# EAGLE board RedBot Accelerometer-Panel-v12 (EAGLE 6.5.0), part 1 of 4
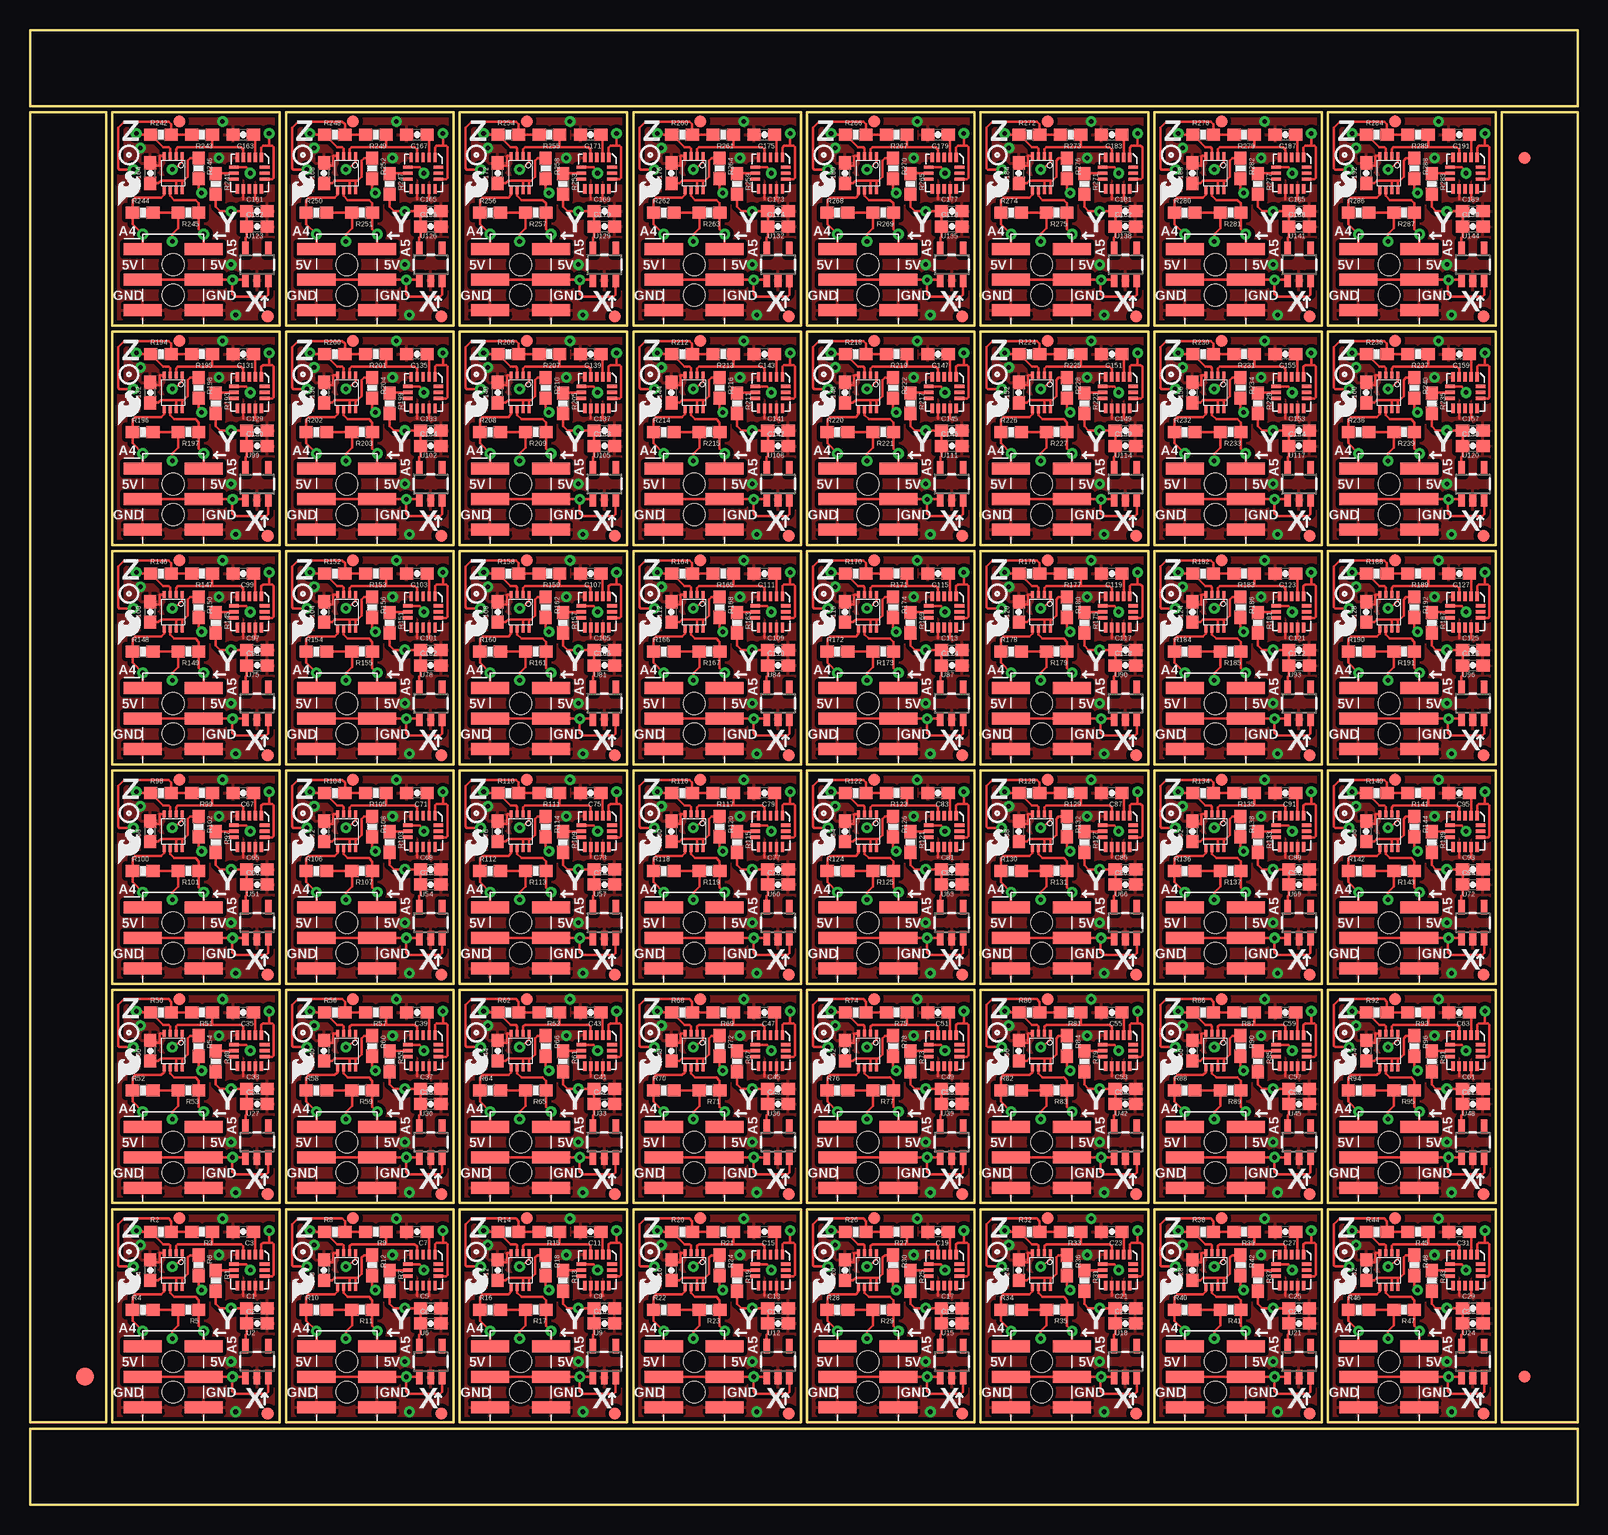
[diagram p0: board, top side]
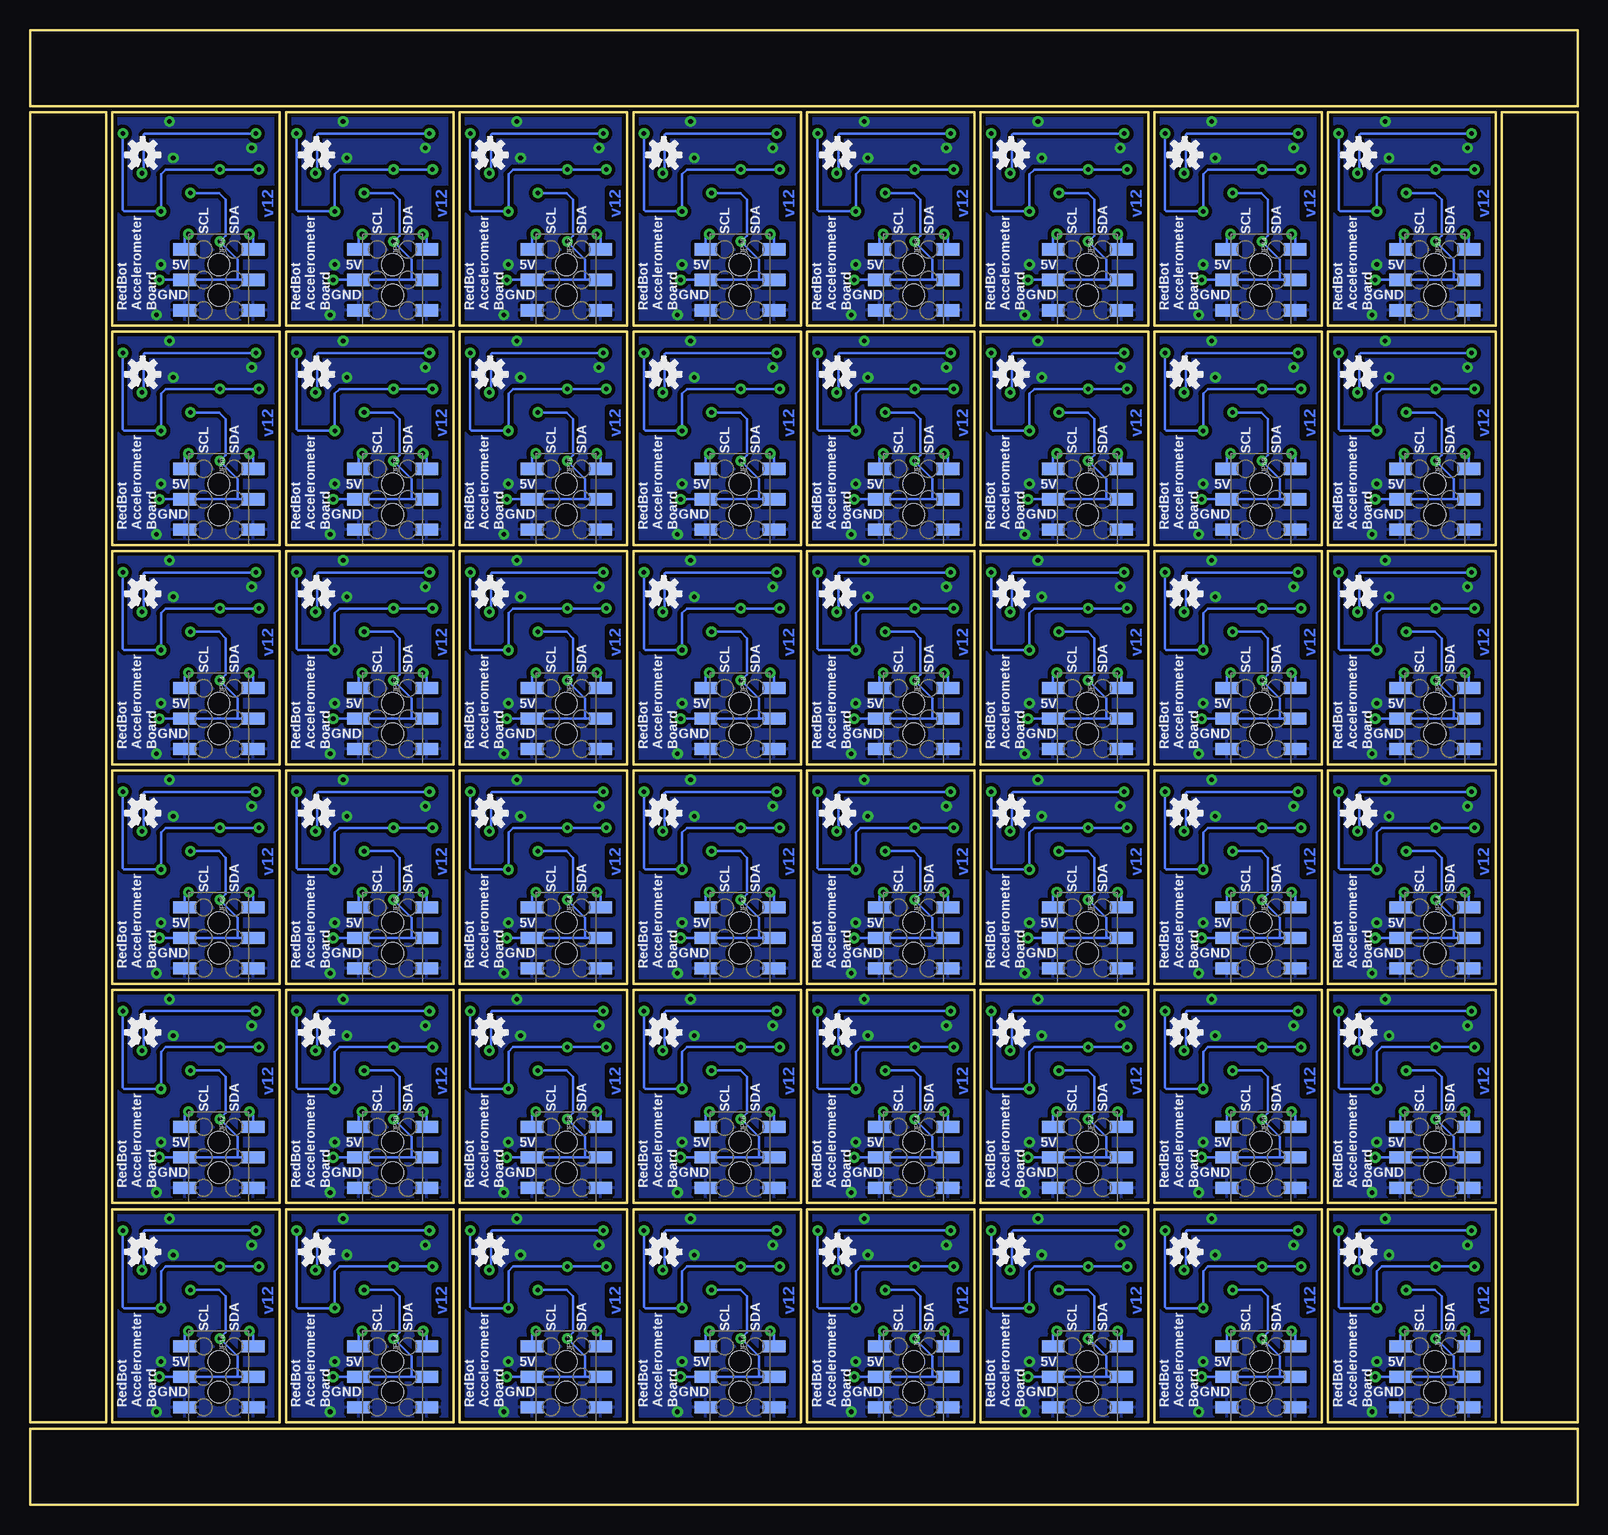
[diagram p1: board, bottom side, seen from below]

Size 129.03 x 122.94 mm. Coordinates in mm from the lower left corner, seen from the top.
Outline: 208 segments
Copper layers (1*16): Top 0.035mm / dielectric 1.5mm / Bottom 0.035mm
Design rules "SparkFun-2-layer": minimum track width 7mil, minimum drill 15mil, track to track 8mil, track to pad 8mil, pad to pad 8mil, via to via 8mil, smd to smd 8mil, copper to edge 8mil, drill to drill 8mil, minimum pad ring 12mil, minimum via ring 10mil, stop-mask expansion 4mil, vias tented up to drill 20mil, thermal gap 10mil

## Footprints (pad centres in the part's own frame; a part is rotated, then mirrored left to right if it is on the bottom)
0603-CAP = smd 1.1 x 1: 1 -0.85,0; 2 0.85,0
FIDUCIAL-1.5X3 = smd 1.5 x 1.5: 1 0,0
FIDUCIAL-1X2 = smd 1 x 1: 1 0,0
2X3_SMT_POSTS = smd 1 x 3.17: 1 -2.54,-2.54; 2 -2.54,2.54; 3 0,-2.54; 4 0,2.54; 5 2.54,-2.54; 6 2.54,2.54 | hole 1.8: -1.27,0; 1.27,0
2X3_SMD = smd 1.02 x 1.9: 1 -2.54,-2.85; 2 -2.54,2.85; 3 0,-2.85; 4 0,2.85; 5 2.54,-2.85; 6 2.54,2.85
0603-RES = smd 1.1 x 1: 1 -0.85,0; 2 0.85,0
MMA8452Q-1:1 = smd 0.8 x 0.275: 1 -1.3,1; 2 -1.3,0.5; 3 -1.3,0; 4 -1.3,-0.5; 5 -1.3,-1; 9 1.3,-1; 10 1.3,-0.5; 11 1.3,0; 12 1.3,0.5; 13 1.3,1 | smd 0.29 x 0.8: 6 -0.5,-1.275; 7 0,-1.275; 8 0.5,-1.275; 14 0.5,1.275; 15 0,1.275; 16 -0.5,1.275
SOT23-5 = smd 0.55 x 1.2: 1 -0.95,-1.3; 2 0,-1.3; 3 0.95,-1.3; 4 0.95,1.3; 5 -0.95,1.3
PCA9306DC-1:1 = smd 0.25 x 0.602: 1 -0.73,-1.446; 2 -0.23,-1.446; 3 0.27,-1.446; 4 0.77,-1.446; 5 0.77,1.431; 6 0.27,1.431; 7 -0.23,1.431; 8 -0.73,1.431

## Placement (x,y rotation side)
C1  0.1uF  [0603-CAP]  18.92,16.38 0 top
C2  4.7uF  [0603-CAP]  18.92,15.11 0 top
C3  0.1uF  [0603-CAP]  17.78,22.76 180 top
C4  0.1uF  [0603-CAP]  10.03,19.56 90 top
C5  0.1uF  [0603-CAP]  33.4,16.38 0 top
C6  4.7uF  [0603-CAP]  33.4,15.11 0 top
C7  0.1uF  [0603-CAP]  32.26,22.76 180 top
C8  0.1uF  [0603-CAP]  24.51,19.56 90 top
C9  0.1uF  [0603-CAP]  47.88,16.38 0 top
C10  4.7uF  [0603-CAP]  47.88,15.11 0 top
C11  0.1uF  [0603-CAP]  46.74,22.76 180 top
C12  0.1uF  [0603-CAP]  38.99,19.56 90 top
C13  0.1uF  [0603-CAP]  62.36,16.38 0 top
C14  4.7uF  [0603-CAP]  62.36,15.11 0 top
C15  0.1uF  [0603-CAP]  61.21,22.76 180 top
C16  0.1uF  [0603-CAP]  53.47,19.56 90 top
C17  0.1uF  [0603-CAP]  76.83,16.38 0 top
C18  4.7uF  [0603-CAP]  76.83,15.11 0 top
C19  0.1uF  [0603-CAP]  75.69,22.76 180 top
C20  0.1uF  [0603-CAP]  67.94,19.56 90 top
C21  0.1uF  [0603-CAP]  91.31,16.38 0 top
C22  4.7uF  [0603-CAP]  91.31,15.11 0 top
C23  0.1uF  [0603-CAP]  90.17,22.76 180 top
C24  0.1uF  [0603-CAP]  82.42,19.56 90 top
C25  0.1uF  [0603-CAP]  105.79,16.38 0 top
C26  4.7uF  [0603-CAP]  105.79,15.11 0 top
C27  0.1uF  [0603-CAP]  104.65,22.76 180 top
C28  0.1uF  [0603-CAP]  96.9,19.56 90 top
C29  0.1uF  [0603-CAP]  120.27,16.38 0 top
C30  4.7uF  [0603-CAP]  120.27,15.11 0 top
C31  0.1uF  [0603-CAP]  119.13,22.76 180 top
C32  0.1uF  [0603-CAP]  111.38,19.56 90 top
C33  0.1uF  [0603-CAP]  18.92,34.67 0 top
C34  4.7uF  [0603-CAP]  18.92,33.4 0 top
C35  0.1uF  [0603-CAP]  17.78,41.05 180 top
C36  0.1uF  [0603-CAP]  10.03,37.85 90 top
C37  0.1uF  [0603-CAP]  33.4,34.67 0 top
C38  4.7uF  [0603-CAP]  33.4,33.4 0 top
C39  0.1uF  [0603-CAP]  32.26,41.05 180 top
C40  0.1uF  [0603-CAP]  24.51,37.85 90 top
C41  0.1uF  [0603-CAP]  47.88,34.67 0 top
C42  4.7uF  [0603-CAP]  47.88,33.4 0 top
C43  0.1uF  [0603-CAP]  46.74,41.05 180 top
C44  0.1uF  [0603-CAP]  38.99,37.85 90 top
C45  0.1uF  [0603-CAP]  62.36,34.67 0 top
C46  4.7uF  [0603-CAP]  62.36,33.4 0 top
C47  0.1uF  [0603-CAP]  61.21,41.05 180 top
C48  0.1uF  [0603-CAP]  53.47,37.85 90 top
C49  0.1uF  [0603-CAP]  76.83,34.67 0 top
C50  4.7uF  [0603-CAP]  76.83,33.4 0 top
C51  0.1uF  [0603-CAP]  75.69,41.05 180 top
C52  0.1uF  [0603-CAP]  67.94,37.85 90 top
C53  0.1uF  [0603-CAP]  91.31,34.67 0 top
C54  4.7uF  [0603-CAP]  91.31,33.4 0 top
C55  0.1uF  [0603-CAP]  90.17,41.05 180 top
C56  0.1uF  [0603-CAP]  82.42,37.85 90 top
C57  0.1uF  [0603-CAP]  105.79,34.67 0 top
C58  4.7uF  [0603-CAP]  105.79,33.4 0 top
C59  0.1uF  [0603-CAP]  104.65,41.05 180 top
C60  0.1uF  [0603-CAP]  96.9,37.85 90 top
C61  0.1uF  [0603-CAP]  120.27,34.67 0 top
C62  4.7uF  [0603-CAP]  120.27,33.4 0 top
C63  0.1uF  [0603-CAP]  119.13,41.05 180 top
C64  0.1uF  [0603-CAP]  111.38,37.85 90 top
C65  0.1uF  [0603-CAP]  18.92,52.96 0 top
C66  4.7uF  [0603-CAP]  18.92,51.69 0 top
C67  0.1uF  [0603-CAP]  17.78,59.34 180 top
C68  0.1uF  [0603-CAP]  10.03,56.13 90 top
C69  0.1uF  [0603-CAP]  33.4,52.96 0 top
C70  4.7uF  [0603-CAP]  33.4,51.69 0 top
C71  0.1uF  [0603-CAP]  32.26,59.34 180 top
C72  0.1uF  [0603-CAP]  24.51,56.13 90 top
C73  0.1uF  [0603-CAP]  47.88,52.96 0 top
C74  4.7uF  [0603-CAP]  47.88,51.69 0 top
C75  0.1uF  [0603-CAP]  46.74,59.34 180 top
C76  0.1uF  [0603-CAP]  38.99,56.13 90 top
C77  0.1uF  [0603-CAP]  62.36,52.96 0 top
C78  4.7uF  [0603-CAP]  62.36,51.69 0 top
C79  0.1uF  [0603-CAP]  61.21,59.34 180 top
C80  0.1uF  [0603-CAP]  53.47,56.13 90 top
C81  0.1uF  [0603-CAP]  76.83,52.96 0 top
C82  4.7uF  [0603-CAP]  76.83,51.69 0 top
C83  0.1uF  [0603-CAP]  75.69,59.34 180 top
C84  0.1uF  [0603-CAP]  67.94,56.13 90 top
C85  0.1uF  [0603-CAP]  91.31,52.96 0 top
C86  4.7uF  [0603-CAP]  91.31,51.69 0 top
C87  0.1uF  [0603-CAP]  90.17,59.34 180 top
C88  0.1uF  [0603-CAP]  82.42,56.13 90 top
C89  0.1uF  [0603-CAP]  105.79,52.96 0 top
C90  4.7uF  [0603-CAP]  105.79,51.69 0 top
C91  0.1uF  [0603-CAP]  104.65,59.34 180 top
C92  0.1uF  [0603-CAP]  96.9,56.13 90 top
C93  0.1uF  [0603-CAP]  120.27,52.96 0 top
C94  4.7uF  [0603-CAP]  120.27,51.69 0 top
C95  0.1uF  [0603-CAP]  119.13,59.34 180 top
C96  0.1uF  [0603-CAP]  111.38,56.13 90 top
C97  0.1uF  [0603-CAP]  18.92,71.25 0 top
C98  4.7uF  [0603-CAP]  18.92,69.98 0 top
C99  0.1uF  [0603-CAP]  17.78,77.62 180 top
C100  0.1uF  [0603-CAP]  10.03,74.42 90 top
C101  0.1uF  [0603-CAP]  33.4,71.25 0 top
C102  4.7uF  [0603-CAP]  33.4,69.98 0 top
C103  0.1uF  [0603-CAP]  32.26,77.62 180 top
C104  0.1uF  [0603-CAP]  24.51,74.42 90 top
C105  0.1uF  [0603-CAP]  47.88,71.25 0 top
C106  4.7uF  [0603-CAP]  47.88,69.98 0 top
C107  0.1uF  [0603-CAP]  46.74,77.62 180 top
C108  0.1uF  [0603-CAP]  38.99,74.42 90 top
C109  0.1uF  [0603-CAP]  62.36,71.25 0 top
C110  4.7uF  [0603-CAP]  62.36,69.98 0 top
C111  0.1uF  [0603-CAP]  61.21,77.62 180 top
C112  0.1uF  [0603-CAP]  53.47,74.42 90 top
C113  0.1uF  [0603-CAP]  76.83,71.25 0 top
C114  4.7uF  [0603-CAP]  76.83,69.98 0 top
C115  0.1uF  [0603-CAP]  75.69,77.62 180 top
C116  0.1uF  [0603-CAP]  67.94,74.42 90 top
C117  0.1uF  [0603-CAP]  91.31,71.25 0 top
C118  4.7uF  [0603-CAP]  91.31,69.98 0 top
C119  0.1uF  [0603-CAP]  90.17,77.62 180 top
C120  0.1uF  [0603-CAP]  82.42,74.42 90 top
C121  0.1uF  [0603-CAP]  105.79,71.25 0 top
C122  4.7uF  [0603-CAP]  105.79,69.98 0 top
C123  0.1uF  [0603-CAP]  104.65,77.62 180 top
C124  0.1uF  [0603-CAP]  96.9,74.42 90 top
C125  0.1uF  [0603-CAP]  120.27,71.25 0 top
C126  4.7uF  [0603-CAP]  120.27,69.98 0 top
C127  0.1uF  [0603-CAP]  119.13,77.62 180 top
C128  0.1uF  [0603-CAP]  111.38,74.42 90 top
C129  0.1uF  [0603-CAP]  18.92,89.53 0 top
C130  4.7uF  [0603-CAP]  18.92,88.27 0 top
C131  0.1uF  [0603-CAP]  17.78,95.91 180 top
C132  0.1uF  [0603-CAP]  10.03,92.71 90 top
C133  0.1uF  [0603-CAP]  33.4,89.53 0 top
C134  4.7uF  [0603-CAP]  33.4,88.27 0 top
C135  0.1uF  [0603-CAP]  32.26,95.91 180 top
C136  0.1uF  [0603-CAP]  24.51,92.71 90 top
C137  0.1uF  [0603-CAP]  47.88,89.53 0 top
C138  4.7uF  [0603-CAP]  47.88,88.27 0 top
C139  0.1uF  [0603-CAP]  46.74,95.91 180 top
C140  0.1uF  [0603-CAP]  38.99,92.71 90 top
C141  0.1uF  [0603-CAP]  62.36,89.53 0 top
C142  4.7uF  [0603-CAP]  62.36,88.27 0 top
C143  0.1uF  [0603-CAP]  61.21,95.91 180 top
C144  0.1uF  [0603-CAP]  53.47,92.71 90 top
C145  0.1uF  [0603-CAP]  76.83,89.53 0 top
C146  4.7uF  [0603-CAP]  76.83,88.27 0 top
C147  0.1uF  [0603-CAP]  75.69,95.91 180 top
C148  0.1uF  [0603-CAP]  67.94,92.71 90 top
C149  0.1uF  [0603-CAP]  91.31,89.53 0 top
C150  4.7uF  [0603-CAP]  91.31,88.27 0 top
C151  0.1uF  [0603-CAP]  90.17,95.91 180 top
C152  0.1uF  [0603-CAP]  82.42,92.71 90 top
C153  0.1uF  [0603-CAP]  105.79,89.53 0 top
C154  4.7uF  [0603-CAP]  105.79,88.27 0 top
C155  0.1uF  [0603-CAP]  104.65,95.91 180 top
C156  0.1uF  [0603-CAP]  96.9,92.71 90 top
C157  0.1uF  [0603-CAP]  120.27,89.53 0 top
C158  4.7uF  [0603-CAP]  120.27,88.27 0 top
C159  0.1uF  [0603-CAP]  119.13,95.91 180 top
C160  0.1uF  [0603-CAP]  111.38,92.71 90 top
C161  0.1uF  [0603-CAP]  18.92,107.82 0 top
C162  4.7uF  [0603-CAP]  18.92,106.55 0 top
C163  0.1uF  [0603-CAP]  17.78,114.2 180 top
C164  0.1uF  [0603-CAP]  10.03,111 90 top
C165  0.1uF  [0603-CAP]  33.4,107.82 0 top
C166  4.7uF  [0603-CAP]  33.4,106.55 0 top
C167  0.1uF  [0603-CAP]  32.26,114.2 180 top
C168  0.1uF  [0603-CAP]  24.51,111 90 top
C169  0.1uF  [0603-CAP]  47.88,107.82 0 top
C170  4.7uF  [0603-CAP]  47.88,106.55 0 top
C171  0.1uF  [0603-CAP]  46.74,114.2 180 top
C172  0.1uF  [0603-CAP]  38.99,111 90 top
C173  0.1uF  [0603-CAP]  62.36,107.82 0 top
C174  4.7uF  [0603-CAP]  62.36,106.55 0 top
C175  0.1uF  [0603-CAP]  61.21,114.2 180 top
C176  0.1uF  [0603-CAP]  53.47,111 90 top
C177  0.1uF  [0603-CAP]  76.83,107.82 0 top
C178  4.7uF  [0603-CAP]  76.83,106.55 0 top
C179  0.1uF  [0603-CAP]  75.69,114.2 180 top
C180  0.1uF  [0603-CAP]  67.94,111 90 top
C181  0.1uF  [0603-CAP]  91.31,107.82 0 top
C182  4.7uF  [0603-CAP]  91.31,106.55 0 top
C183  0.1uF  [0603-CAP]  90.17,114.2 180 top
C184  0.1uF  [0603-CAP]  82.42,111 90 top
C185  0.1uF  [0603-CAP]  105.79,107.82 0 top
C186  4.7uF  [0603-CAP]  105.79,106.55 0 top
C187  0.1uF  [0603-CAP]  104.65,114.2 180 top
C188  0.1uF  [0603-CAP]  96.9,111 90 top
C189  0.1uF  [0603-CAP]  120.27,107.82 0 top
C190  4.7uF  [0603-CAP]  120.27,106.55 0 top
C191  0.1uF  [0603-CAP]  119.13,114.2 180 top
C192  0.1uF  [0603-CAP]  111.38,111 90 top
E$1  [FIDUCIAL-1.5X3]  4.57,10.67 0 top
E$4  [FIDUCIAL-1X2]  124.59,10.67 0 top
E$6  [FIDUCIAL-1X2]  124.59,112.27 180 top
FID1  FIDUCIAL1X2  [FIDUCIAL-1X2]  19.81,7.62 0 top
FID2  FIDUCIAL1X2  [FIDUCIAL-1X2]  12.45,23.88 0 top
FID3  FIDUCIAL1X2  [FIDUCIAL-1X2]  34.29,7.62 0 top
FID4  FIDUCIAL1X2  [FIDUCIAL-1X2]  26.92,23.88 0 top
FID5  FIDUCIAL1X2  [FIDUCIAL-1X2]  48.77,7.62 0 top
FID6  FIDUCIAL1X2  [FIDUCIAL-1X2]  41.4,23.88 0 top
FID7  FIDUCIAL1X2  [FIDUCIAL-1X2]  63.25,7.62 0 top
FID8  FIDUCIAL1X2  [FIDUCIAL-1X2]  55.88,23.88 0 top
FID9  FIDUCIAL1X2  [FIDUCIAL-1X2]  77.72,7.62 0 top
FID10  FIDUCIAL1X2  [FIDUCIAL-1X2]  70.36,23.88 0 top
FID11  FIDUCIAL1X2  [FIDUCIAL-1X2]  92.2,7.62 0 top
FID12  FIDUCIAL1X2  [FIDUCIAL-1X2]  84.84,23.88 0 top
FID13  FIDUCIAL1X2  [FIDUCIAL-1X2]  106.68,7.62 0 top
FID14  FIDUCIAL1X2  [FIDUCIAL-1X2]  99.31,23.88 0 top
FID15  FIDUCIAL1X2  [FIDUCIAL-1X2]  121.16,7.62 0 top
FID16  FIDUCIAL1X2  [FIDUCIAL-1X2]  113.79,23.88 0 top
FID17  FIDUCIAL1X2  [FIDUCIAL-1X2]  19.81,25.91 0 top
FID18  FIDUCIAL1X2  [FIDUCIAL-1X2]  12.45,42.16 0 top
FID19  FIDUCIAL1X2  [FIDUCIAL-1X2]  34.29,25.91 0 top
FID20  FIDUCIAL1X2  [FIDUCIAL-1X2]  26.92,42.16 0 top
FID21  FIDUCIAL1X2  [FIDUCIAL-1X2]  48.77,25.91 0 top
FID22  FIDUCIAL1X2  [FIDUCIAL-1X2]  41.4,42.16 0 top
FID23  FIDUCIAL1X2  [FIDUCIAL-1X2]  63.25,25.91 0 top
FID24  FIDUCIAL1X2  [FIDUCIAL-1X2]  55.88,42.16 0 top
FID25  FIDUCIAL1X2  [FIDUCIAL-1X2]  77.72,25.91 0 top
FID26  FIDUCIAL1X2  [FIDUCIAL-1X2]  70.36,42.16 0 top
FID27  FIDUCIAL1X2  [FIDUCIAL-1X2]  92.2,25.91 0 top
FID28  FIDUCIAL1X2  [FIDUCIAL-1X2]  84.84,42.16 0 top
FID29  FIDUCIAL1X2  [FIDUCIAL-1X2]  106.68,25.91 0 top
FID30  FIDUCIAL1X2  [FIDUCIAL-1X2]  99.31,42.16 0 top
FID31  FIDUCIAL1X2  [FIDUCIAL-1X2]  121.16,25.91 0 top
FID32  FIDUCIAL1X2  [FIDUCIAL-1X2]  113.79,42.16 0 top
FID33  FIDUCIAL1X2  [FIDUCIAL-1X2]  19.81,44.2 0 top
FID34  FIDUCIAL1X2  [FIDUCIAL-1X2]  12.45,60.45 0 top
FID35  FIDUCIAL1X2  [FIDUCIAL-1X2]  34.29,44.2 0 top
FID36  FIDUCIAL1X2  [FIDUCIAL-1X2]  26.92,60.45 0 top
FID37  FIDUCIAL1X2  [FIDUCIAL-1X2]  48.77,44.2 0 top
FID38  FIDUCIAL1X2  [FIDUCIAL-1X2]  41.4,60.45 0 top
FID39  FIDUCIAL1X2  [FIDUCIAL-1X2]  63.25,44.2 0 top
FID40  FIDUCIAL1X2  [FIDUCIAL-1X2]  55.88,60.45 0 top
FID41  FIDUCIAL1X2  [FIDUCIAL-1X2]  77.72,44.2 0 top
FID42  FIDUCIAL1X2  [FIDUCIAL-1X2]  70.36,60.45 0 top
FID43  FIDUCIAL1X2  [FIDUCIAL-1X2]  92.2,44.2 0 top
FID44  FIDUCIAL1X2  [FIDUCIAL-1X2]  84.84,60.45 0 top
FID45  FIDUCIAL1X2  [FIDUCIAL-1X2]  106.68,44.2 0 top
FID46  FIDUCIAL1X2  [FIDUCIAL-1X2]  99.31,60.45 0 top
FID47  FIDUCIAL1X2  [FIDUCIAL-1X2]  121.16,44.2 0 top
FID48  FIDUCIAL1X2  [FIDUCIAL-1X2]  113.79,60.45 0 top
FID49  FIDUCIAL1X2  [FIDUCIAL-1X2]  19.81,62.48 0 top
FID50  FIDUCIAL1X2  [FIDUCIAL-1X2]  12.45,78.74 0 top
FID51  FIDUCIAL1X2  [FIDUCIAL-1X2]  34.29,62.48 0 top
FID52  FIDUCIAL1X2  [FIDUCIAL-1X2]  26.92,78.74 0 top
FID53  FIDUCIAL1X2  [FIDUCIAL-1X2]  48.77,62.48 0 top
FID54  FIDUCIAL1X2  [FIDUCIAL-1X2]  41.4,78.74 0 top
FID55  FIDUCIAL1X2  [FIDUCIAL-1X2]  63.25,62.48 0 top
FID56  FIDUCIAL1X2  [FIDUCIAL-1X2]  55.88,78.74 0 top
FID57  FIDUCIAL1X2  [FIDUCIAL-1X2]  77.72,62.48 0 top
FID58  FIDUCIAL1X2  [FIDUCIAL-1X2]  70.36,78.74 0 top
FID59  FIDUCIAL1X2  [FIDUCIAL-1X2]  92.2,62.48 0 top
FID60  FIDUCIAL1X2  [FIDUCIAL-1X2]  84.84,78.74 0 top
FID61  FIDUCIAL1X2  [FIDUCIAL-1X2]  106.68,62.48 0 top
FID62  FIDUCIAL1X2  [FIDUCIAL-1X2]  99.31,78.74 0 top
FID63  FIDUCIAL1X2  [FIDUCIAL-1X2]  121.16,62.48 0 top
FID64  FIDUCIAL1X2  [FIDUCIAL-1X2]  113.79,78.74 0 top
FID65  FIDUCIAL1X2  [FIDUCIAL-1X2]  19.81,80.77 0 top
FID66  FIDUCIAL1X2  [FIDUCIAL-1X2]  12.45,97.03 0 top
FID67  FIDUCIAL1X2  [FIDUCIAL-1X2]  34.29,80.77 0 top
FID68  FIDUCIAL1X2  [FIDUCIAL-1X2]  26.92,97.03 0 top
FID69  FIDUCIAL1X2  [FIDUCIAL-1X2]  48.77,80.77 0 top
FID70  FIDUCIAL1X2  [FIDUCIAL-1X2]  41.4,97.03 0 top
FID71  FIDUCIAL1X2  [FIDUCIAL-1X2]  63.25,80.77 0 top
FID72  FIDUCIAL1X2  [FIDUCIAL-1X2]  55.88,97.03 0 top
FID73  FIDUCIAL1X2  [FIDUCIAL-1X2]  77.72,80.77 0 top
FID74  FIDUCIAL1X2  [FIDUCIAL-1X2]  70.36,97.03 0 top
FID75  FIDUCIAL1X2  [FIDUCIAL-1X2]  92.2,80.77 0 top
FID76  FIDUCIAL1X2  [FIDUCIAL-1X2]  84.84,97.03 0 top
FID77  FIDUCIAL1X2  [FIDUCIAL-1X2]  106.68,80.77 0 top
FID78  FIDUCIAL1X2  [FIDUCIAL-1X2]  99.31,97.03 0 top
FID79  FIDUCIAL1X2  [FIDUCIAL-1X2]  121.16,80.77 0 top
FID80  FIDUCIAL1X2  [FIDUCIAL-1X2]  113.79,97.03 0 top
FID81  FIDUCIAL1X2  [FIDUCIAL-1X2]  19.81,99.06 0 top
FID82  FIDUCIAL1X2  [FIDUCIAL-1X2]  12.45,115.32 0 top
FID83  FIDUCIAL1X2  [FIDUCIAL-1X2]  34.29,99.06 0 top
FID84  FIDUCIAL1X2  [FIDUCIAL-1X2]  26.92,115.32 0 top
FID85  FIDUCIAL1X2  [FIDUCIAL-1X2]  48.77,99.06 0 top
FID86  FIDUCIAL1X2  [FIDUCIAL-1X2]  41.4,115.32 0 top
FID87  FIDUCIAL1X2  [FIDUCIAL-1X2]  63.25,99.06 0 top
FID88  FIDUCIAL1X2  [FIDUCIAL-1X2]  55.88,115.32 0 top
FID89  FIDUCIAL1X2  [FIDUCIAL-1X2]  77.72,99.06 0 top
FID90  FIDUCIAL1X2  [FIDUCIAL-1X2]  70.36,115.32 0 top
FID91  FIDUCIAL1X2  [FIDUCIAL-1X2]  92.2,99.06 0 top
FID92  FIDUCIAL1X2  [FIDUCIAL-1X2]  84.84,115.32 0 top
FID93  FIDUCIAL1X2  [FIDUCIAL-1X2]  106.68,99.06 0 top
FID94  FIDUCIAL1X2  [FIDUCIAL-1X2]  99.31,115.32 0 top
FID95  FIDUCIAL1X2  [FIDUCIAL-1X2]  121.16,99.06 0 top
FID96  FIDUCIAL1X2  [FIDUCIAL-1X2]  113.79,115.32 0 top
JP1  [2X3_SMT_POSTS]  11.94,10.67 270 top
JP2  [2X3_SMD]  11.94,10.67 270 bottom
JP3  [2X3_SMT_POSTS]  26.42,10.67 270 top
JP4  [2X3_SMD]  26.42,10.67 270 bottom
JP5  [2X3_SMT_POSTS]  40.89,10.67 270 top
JP6  [2X3_SMD]  40.89,10.67 270 bottom
JP7  [2X3_SMT_POSTS]  55.37,10.67 270 top
JP8  [2X3_SMD]  55.37,10.67 270 bottom
JP9  [2X3_SMT_POSTS]  69.85,10.67 270 top
JP10  [2X3_SMD]  69.85,10.67 270 bottom
JP11  [2X3_SMT_POSTS]  84.33,10.67 270 top
JP12  [2X3_SMD]  84.33,10.67 270 bottom
JP13  [2X3_SMT_POSTS]  98.81,10.67 270 top
JP14  [2X3_SMD]  98.81,10.67 270 bottom
JP15  [2X3_SMT_POSTS]  113.28,10.67 270 top
JP16  [2X3_SMD]  113.28,10.67 270 bottom
JP17  [2X3_SMT_POSTS]  11.94,28.96 270 top
JP18  [2X3_SMD]  11.94,28.96 270 bottom
JP19  [2X3_SMT_POSTS]  26.42,28.96 270 top
JP20  [2X3_SMD]  26.42,28.96 270 bottom
JP21  [2X3_SMT_POSTS]  40.89,28.96 270 top
JP22  [2X3_SMD]  40.89,28.96 270 bottom
JP23  [2X3_SMT_POSTS]  55.37,28.96 270 top
JP24  [2X3_SMD]  55.37,28.96 270 bottom
JP25  [2X3_SMT_POSTS]  69.85,28.96 270 top
JP26  [2X3_SMD]  69.85,28.96 270 bottom
JP27  [2X3_SMT_POSTS]  84.33,28.96 270 top
JP28  [2X3_SMD]  84.33,28.96 270 bottom
JP29  [2X3_SMT_POSTS]  98.81,28.96 270 top
JP30  [2X3_SMD]  98.81,28.96 270 bottom
JP31  [2X3_SMT_POSTS]  113.28,28.96 270 top
JP32  [2X3_SMD]  113.28,28.96 270 bottom
JP33  [2X3_SMT_POSTS]  11.94,47.24 270 top
JP34  [2X3_SMD]  11.94,47.24 270 bottom
JP35  [2X3_SMT_POSTS]  26.42,47.24 270 top
JP36  [2X3_SMD]  26.42,47.24 270 bottom
JP37  [2X3_SMT_POSTS]  40.89,47.24 270 top
JP38  [2X3_SMD]  40.89,47.24 270 bottom
JP39  [2X3_SMT_POSTS]  55.37,47.24 270 top
JP40  [2X3_SMD]  55.37,47.24 270 bottom
JP41  [2X3_SMT_POSTS]  69.85,47.24 270 top
JP42  [2X3_SMD]  69.85,47.24 270 bottom
JP43  [2X3_SMT_POSTS]  84.33,47.24 270 top
JP44  [2X3_SMD]  84.33,47.24 270 bottom
JP45  [2X3_SMT_POSTS]  98.81,47.24 270 top
JP46  [2X3_SMD]  98.81,47.24 270 bottom
JP47  [2X3_SMT_POSTS]  113.28,47.24 270 top
JP48  [2X3_SMD]  113.28,47.24 270 bottom
JP49  [2X3_SMT_POSTS]  11.94,65.53 270 top
JP50  [2X3_SMD]  11.94,65.53 270 bottom
JP51  [2X3_SMT_POSTS]  26.42,65.53 270 top
JP52  [2X3_SMD]  26.42,65.53 270 bottom
JP53  [2X3_SMT_POSTS]  40.89,65.53 270 top
JP54  [2X3_SMD]  40.89,65.53 270 bottom
JP55  [2X3_SMT_POSTS]  55.37,65.53 270 top
JP56  [2X3_SMD]  55.37,65.53 270 bottom
JP57  [2X3_SMT_POSTS]  69.85,65.53 270 top
JP58  [2X3_SMD]  69.85,65.53 270 bottom
JP59  [2X3_SMT_POSTS]  84.33,65.53 270 top
JP60  [2X3_SMD]  84.33,65.53 270 bottom
JP61  [2X3_SMT_POSTS]  98.81,65.53 270 top
JP62  [2X3_SMD]  98.81,65.53 270 bottom
JP63  [2X3_SMT_POSTS]  113.28,65.53 270 top
JP64  [2X3_SMD]  113.28,65.53 270 bottom
JP65  [2X3_SMT_POSTS]  11.94,83.82 270 top
JP66  [2X3_SMD]  11.94,83.82 270 bottom
JP67  [2X3_SMT_POSTS]  26.42,83.82 270 top
JP68  [2X3_SMD]  26.42,83.82 270 bottom
JP69  [2X3_SMT_POSTS]  40.89,83.82 270 top
JP70  [2X3_SMD]  40.89,83.82 270 bottom
JP71  [2X3_SMT_POSTS]  55.37,83.82 270 top
JP72  [2X3_SMD]  55.37,83.82 270 bottom
JP73  [2X3_SMT_POSTS]  69.85,83.82 270 top
JP74  [2X3_SMD]  69.85,83.82 270 bottom
JP75  [2X3_SMT_POSTS]  84.33,83.82 270 top
JP76  [2X3_SMD]  84.33,83.82 270 bottom
JP77  [2X3_SMT_POSTS]  98.81,83.82 270 top
JP78  [2X3_SMD]  98.81,83.82 270 bottom
JP79  [2X3_SMT_POSTS]  113.28,83.82 270 top
JP80  [2X3_SMD]  113.28,83.82 270 bottom
JP81  [2X3_SMT_POSTS]  11.94,102.11 270 top
JP82  [2X3_SMD]  11.94,102.11 270 bottom
JP83  [2X3_SMT_POSTS]  26.42,102.11 270 top
JP84  [2X3_SMD]  26.42,102.11 270 bottom
JP85  [2X3_SMT_POSTS]  40.89,102.11 270 top
JP86  [2X3_SMD]  40.89,102.11 270 bottom
JP87  [2X3_SMT_POSTS]  55.37,102.11 270 top
JP88  [2X3_SMD]  55.37,102.11 270 bottom
JP89  [2X3_SMT_POSTS]  69.85,102.11 270 top
JP90  [2X3_SMD]  69.85,102.11 270 bottom
JP91  [2X3_SMT_POSTS]  84.33,102.11 270 top
JP92  [2X3_SMD]  84.33,102.11 270 bottom
JP93  [2X3_SMT_POSTS]  98.81,102.11 270 top
JP94  [2X3_SMD]  98.81,102.11 270 bottom
JP95  [2X3_SMT_POSTS]  113.28,102.11 270 top
JP96  [2X3_SMD]  113.28,102.11 270 bottom
LOGO1  LOGO-SFESK  [SFE-LOGO-FLAME]  7.37,16.89 0 top
LOGO2  OSHW-LOGOS  [OSHW-LOGO-S]  18.29,21.08 0 bottom
LOGO3  LOGO-SFESK  [SFE-LOGO-FLAME]  21.84,16.89 0 top
LOGO4  OSHW-LOGOS  [OSHW-LOGO-S]  32.77,21.08 0 bottom
LOGO5  LOGO-SFESK  [SFE-LOGO-FLAME]  36.32,16.89 0 top
LOGO6  OSHW-LOGOS  [OSHW-LOGO-S]  47.24,21.08 0 bottom
LOGO7  LOGO-SFESK  [SFE-LOGO-FLAME]  50.8,16.89 0 top
LOGO8  OSHW-LOGOS  [OSHW-LOGO-S]  61.72,21.08 0 bottom
LOGO9  LOGO-SFESK  [SFE-LOGO-FLAME]  65.28,16.89 0 top
LOGO10  OSHW-LOGOS  [OSHW-LOGO-S]  76.2,21.08 0 bottom
LOGO11  LOGO-SFESK  [SFE-LOGO-FLAME]  79.76,16.89 0 top
LOGO12  OSHW-LOGOS  [OSHW-LOGO-S]  90.68,21.08 0 bottom
LOGO13  LOGO-SFESK  [SFE-LOGO-FLAME]  94.23,16.89 0 top
LOGO14  OSHW-LOGOS  [OSHW-LOGO-S]  105.16,21.08 0 bottom
LOGO15  LOGO-SFESK  [SFE-LOGO-FLAME]  108.71,16.89 0 top
LOGO16  OSHW-LOGOS  [OSHW-LOGO-S]  119.63,21.08 0 bottom
LOGO17  LOGO-SFESK  [SFE-LOGO-FLAME]  7.37,35.18 0 top
LOGO18  OSHW-LOGOS  [OSHW-LOGO-S]  18.29,39.37 0 bottom
LOGO19  LOGO-SFESK  [SFE-LOGO-FLAME]  21.84,35.18 0 top
LOGO20  OSHW-LOGOS  [OSHW-LOGO-S]  32.77,39.37 0 bottom
LOGO21  LOGO-SFESK  [SFE-LOGO-FLAME]  36.32,35.18 0 top
LOGO22  OSHW-LOGOS  [OSHW-LOGO-S]  47.24,39.37 0 bottom
LOGO23  LOGO-SFESK  [SFE-LOGO-FLAME]  50.8,35.18 0 top
LOGO24  OSHW-LOGOS  [OSHW-LOGO-S]  61.72,39.37 0 bottom
LOGO25  LOGO-SFESK  [SFE-LOGO-FLAME]  65.28,35.18 0 top
LOGO26  OSHW-LOGOS  [OSHW-LOGO-S]  76.2,39.37 0 bottom
LOGO27  LOGO-SFESK  [SFE-LOGO-FLAME]  79.76,35.18 0 top
LOGO28  OSHW-LOGOS  [OSHW-LOGO-S]  90.68,39.37 0 bottom
LOGO29  LOGO-SFESK  [SFE-LOGO-FLAME]  94.23,35.18 0 top
LOGO30  OSHW-LOGOS  [OSHW-LOGO-S]  105.16,39.37 0 bottom
LOGO31  LOGO-SFESK  [SFE-LOGO-FLAME]  108.71,35.18 0 top
LOGO32  OSHW-LOGOS  [OSHW-LOGO-S]  119.63,39.37 0 bottom
LOGO33  LOGO-SFESK  [SFE-LOGO-FLAME]  7.37,53.47 0 top
LOGO34  OSHW-LOGOS  [OSHW-LOGO-S]  18.29,57.66 0 bottom
LOGO35  LOGO-SFESK  [SFE-LOGO-FLAME]  21.84,53.47 0 top
LOGO36  OSHW-LOGOS  [OSHW-LOGO-S]  32.77,57.66 0 bottom
LOGO37  LOGO-SFESK  [SFE-LOGO-FLAME]  36.32,53.47 0 top
LOGO38  OSHW-LOGOS  [OSHW-LOGO-S]  47.24,57.66 0 bottom
LOGO39  LOGO-SFESK  [SFE-LOGO-FLAME]  50.8,53.47 0 top
LOGO40  OSHW-LOGOS  [OSHW-LOGO-S]  61.72,57.66 0 bottom
LOGO41  LOGO-SFESK  [SFE-LOGO-FLAME]  65.28,53.47 0 top
LOGO42  OSHW-LOGOS  [OSHW-LOGO-S]  76.2,57.66 0 bottom
LOGO43  LOGO-SFESK  [SFE-LOGO-FLAME]  79.76,53.47 0 top
LOGO44  OSHW-LOGOS  [OSHW-LOGO-S]  90.68,57.66 0 bottom
LOGO45  LOGO-SFESK  [SFE-LOGO-FLAME]  94.23,53.47 0 top
LOGO46  OSHW-LOGOS  [OSHW-LOGO-S]  105.16,57.66 0 bottom
LOGO47  LOGO-SFESK  [SFE-LOGO-FLAME]  108.71,53.47 0 top
LOGO48  OSHW-LOGOS  [OSHW-LOGO-S]  119.63,57.66 0 bottom
LOGO49  LOGO-SFESK  [SFE-LOGO-FLAME]  7.37,71.75 0 top
LOGO50  OSHW-LOGOS  [OSHW-LOGO-S]  18.29,75.95 0 bottom
LOGO51  LOGO-SFESK  [SFE-LOGO-FLAME]  21.84,71.75 0 top
LOGO52  OSHW-LOGOS  [OSHW-LOGO-S]  32.77,75.95 0 bottom
LOGO53  LOGO-SFESK  [SFE-LOGO-FLAME]  36.32,71.75 0 top
LOGO54  OSHW-LOGOS  [OSHW-LOGO-S]  47.24,75.95 0 bottom
LOGO55  LOGO-SFESK  [SFE-LOGO-FLAME]  50.8,71.75 0 top
LOGO56  OSHW-LOGOS  [OSHW-LOGO-S]  61.72,75.95 0 bottom
LOGO57  LOGO-SFESK  [SFE-LOGO-FLAME]  65.28,71.75 0 top
LOGO58  OSHW-LOGOS  [OSHW-LOGO-S]  76.2,75.95 0 bottom
LOGO59  LOGO-SFESK  [SFE-LOGO-FLAME]  79.76,71.75 0 top
LOGO60  OSHW-LOGOS  [OSHW-LOGO-S]  90.68,75.95 0 bottom
LOGO61  LOGO-SFESK  [SFE-LOGO-FLAME]  94.23,71.75 0 top
LOGO62  OSHW-LOGOS  [OSHW-LOGO-S]  105.16,75.95 0 bottom
LOGO63  LOGO-SFESK  [SFE-LOGO-FLAME]  108.71,71.75 0 top
LOGO64  OSHW-LOGOS  [OSHW-LOGO-S]  119.63,75.95 0 bottom
LOGO65  LOGO-SFESK  [SFE-LOGO-FLAME]  7.37,90.04 0 top
LOGO66  OSHW-LOGOS  [OSHW-LOGO-S]  18.29,94.23 0 bottom
LOGO67  LOGO-SFESK  [SFE-LOGO-FLAME]  21.84,90.04 0 top
LOGO68  OSHW-LOGOS  [OSHW-LOGO-S]  32.77,94.23 0 bottom
LOGO69  LOGO-SFESK  [SFE-LOGO-FLAME]  36.32,90.04 0 top
LOGO70  OSHW-LOGOS  [OSHW-LOGO-S]  47.24,94.23 0 bottom
LOGO71  LOGO-SFESK  [SFE-LOGO-FLAME]  50.8,90.04 0 top
LOGO72  OSHW-LOGOS  [OSHW-LOGO-S]  61.72,94.23 0 bottom
LOGO73  LOGO-SFESK  [SFE-LOGO-FLAME]  65.28,90.04 0 top
LOGO74  OSHW-LOGOS  [OSHW-LOGO-S]  76.2,94.23 0 bottom
LOGO75  LOGO-SFESK  [SFE-LOGO-FLAME]  79.76,90.04 0 top
LOGO76  OSHW-LOGOS  [OSHW-LOGO-S]  90.68,94.23 0 bottom
LOGO77  LOGO-SFESK  [SFE-LOGO-FLAME]  94.23,90.04 0 top
LOGO78  OSHW-LOGOS  [OSHW-LOGO-S]  105.16,94.23 0 bottom
LOGO79  LOGO-SFESK  [SFE-LOGO-FLAME]  108.71,90.04 0 top
LOGO80  OSHW-LOGOS  [OSHW-LOGO-S]  119.63,94.23 0 bottom
LOGO81  LOGO-SFESK  [SFE-LOGO-FLAME]  7.37,108.33 0 top
LOGO82  OSHW-LOGOS  [OSHW-LOGO-S]  18.29,112.52 0 bottom
LOGO83  LOGO-SFESK  [SFE-LOGO-FLAME]  21.84,108.33 0 top
LOGO84  OSHW-LOGOS  [OSHW-LOGO-S]  32.77,112.52 0 bottom
LOGO85  LOGO-SFESK  [SFE-LOGO-FLAME]  36.32,108.33 0 top
LOGO86  OSHW-LOGOS  [OSHW-LOGO-S]  47.24,112.52 0 bottom
LOGO87  LOGO-SFESK  [SFE-LOGO-FLAME]  50.8,108.33 0 top
LOGO88  OSHW-LOGOS  [OSHW-LOGO-S]  61.72,112.52 0 bottom
LOGO89  LOGO-SFESK  [SFE-LOGO-FLAME]  65.28,108.33 0 top
LOGO90  OSHW-LOGOS  [OSHW-LOGO-S]  76.2,112.52 0 bottom
LOGO91  LOGO-SFESK  [SFE-LOGO-FLAME]  79.76,108.33 0 top
LOGO92  OSHW-LOGOS  [OSHW-LOGO-S]  90.68,112.52 0 bottom
LOGO93  LOGO-SFESK  [SFE-LOGO-FLAME]  94.23,108.33 0 top
LOGO94  OSHW-LOGOS  [OSHW-LOGO-S]  105.16,112.52 0 bottom
LOGO95  LOGO-SFESK  [SFE-LOGO-FLAME]  108.71,108.33 0 top
LOGO96  OSHW-LOGOS  [OSHW-LOGO-S]  119.63,112.52 0 bottom
R1  10k  [0603-RES]  15.49,18.67 270 top
R2  1k  [0603-RES]  10.92,22.76 0 top
R3  1k  [0603-RES]  14.35,22.76 180 top
R4  1k  [0603-RES]  9.4,16.26 0 top
R5  1k  [0603-RES]  13.21,16.26 180 top
R6  200k  [0603-RES]  14.04,19.96 270 top
R7  10k  [0603-RES]  29.97,18.67 270 top
R8  1k  [0603-RES]  25.4,22.76 0 top
R9  1k  [0603-RES]  28.83,22.76 180 top
R10  1k  [0603-RES]  23.88,16.26 0 top
R11  1k  [0603-RES]  27.69,16.26 180 top
R12  200k  [0603-RES]  28.52,19.96 270 top
R13  10k  [0603-RES]  44.45,18.67 270 top
R14  1k  [0603-RES]  39.88,22.76 0 top
R15  1k  [0603-RES]  43.31,22.76 180 top
R16  1k  [0603-RES]  38.35,16.26 0 top
R17  1k  [0603-RES]  42.16,16.26 180 top
R18  200k  [0603-RES]  43,19.96 270 top
R19  10k  [0603-RES]  58.93,18.67 270 top
R20  1k  [0603-RES]  54.36,22.76 0 top
R21  1k  [0603-RES]  57.78,22.76 180 top
R22  1k  [0603-RES]  52.83,16.26 0 top
R23  1k  [0603-RES]  56.64,16.26 180 top
R24  200k  [0603-RES]  57.48,19.96 270 top
R25  10k  [0603-RES]  73.41,18.67 270 top
R26  1k  [0603-RES]  68.83,22.76 0 top
R27  1k  [0603-RES]  72.26,22.76 180 top
R28  1k  [0603-RES]  67.31,16.26 0 top
R29  1k  [0603-RES]  71.12,16.26 180 top
R30  200k  [0603-RES]  71.95,19.96 270 top
R31  10k  [0603-RES]  87.88,18.67 270 top
R32  1k  [0603-RES]  83.31,22.76 0 top
R33  1k  [0603-RES]  86.74,22.76 180 top
R34  1k  [0603-RES]  81.79,16.26 0 top
R35  1k  [0603-RES]  85.6,16.26 180 top
R36  200k  [0603-RES]  86.43,19.96 270 top
R37  10k  [0603-RES]  102.36,18.67 270 top
R38  1k  [0603-RES]  97.79,22.76 0 top
R39  1k  [0603-RES]  101.22,22.76 180 top
R40  1k  [0603-RES]  96.27,16.26 0 top
R41  1k  [0603-RES]  100.08,16.26 180 top
R42  200k  [0603-RES]  100.91,19.96 270 top
R43  10k  [0603-RES]  116.84,18.67 270 top
R44  1k  [0603-RES]  112.27,22.76 0 top
R45  1k  [0603-RES]  115.7,22.76 180 top
R46  1k  [0603-RES]  110.74,16.26 0 top
R47  1k  [0603-RES]  114.55,16.26 180 top
R48  200k  [0603-RES]  115.39,19.96 270 top
R49  10k  [0603-RES]  15.49,36.96 270 top
R50  1k  [0603-RES]  10.92,41.05 0 top
R51  1k  [0603-RES]  14.35,41.05 180 top
R52  1k  [0603-RES]  9.4,34.55 0 top
R53  1k  [0603-RES]  13.21,34.55 180 top
R54  200k  [0603-RES]  14.04,38.25 270 top
R55  10k  [0603-RES]  29.97,36.96 270 top
R56  1k  [0603-RES]  25.4,41.05 0 top
R57  1k  [0603-RES]  28.83,41.05 180 top
R58  1k  [0603-RES]  23.88,34.55 0 top
R59  1k  [0603-RES]  27.69,34.55 180 top
R60  200k  [0603-RES]  28.52,38.25 270 top
R61  10k  [0603-RES]  44.45,36.96 270 top
R62  1k  [0603-RES]  39.88,41.05 0 top
R63  1k  [0603-RES]  43.31,41.05 180 top
R64  1k  [0603-RES]  38.35,34.55 0 top
R65  1k  [0603-RES]  42.16,34.55 180 top
R66  200k  [0603-RES]  43,38.25 270 top
R67  10k  [0603-RES]  58.93,36.96 270 top
R68  1k  [0603-RES]  54.36,41.05 0 top
R69  1k  [0603-RES]  57.78,41.05 180 top
R70  1k  [0603-RES]  52.83,34.55 0 top
R71  1k  [0603-RES]  56.64,34.55 180 top
R72  200k  [0603-RES]  57.48,38.25 270 top
R73  10k  [0603-RES]  73.41,36.96 270 top
R74  1k  [0603-RES]  68.83,41.05 0 top
R75  1k  [0603-RES]  72.26,41.05 180 top
R76  1k  [0603-RES]  67.31,34.55 0 top
R77  1k  [0603-RES]  71.12,34.55 180 top
R78  200k  [0603-RES]  71.95,38.25 270 top
R79  10k  [0603-RES]  87.88,36.96 270 top
R80  1k  [0603-RES]  83.31,41.05 0 top
R81  1k  [0603-RES]  86.74,41.05 180 top
R82  1k  [0603-RES]  81.79,34.55 0 top
R83  1k  [0603-RES]  85.6,34.55 180 top
R84  200k  [0603-RES]  86.43,38.25 270 top
R85  10k  [0603-RES]  102.36,36.96 270 top
R86  1k  [0603-RES]  97.79,41.05 0 top
R87  1k  [0603-RES]  101.22,41.05 180 top
R88  1k  [0603-RES]  96.27,34.55 0 top
R89  1k  [0603-RES]  100.08,34.55 180 top
R90  200k  [0603-RES]  100.91,38.25 270 top
R91  10k  [0603-RES]  116.84,36.96 270 top
R92  1k  [0603-RES]  112.27,41.05 0 top
R93  1k  [0603-RES]  115.7,41.05 180 top
R94  1k  [0603-RES]  110.74,34.55 0 top
R95  1k  [0603-RES]  114.55,34.55 180 top
R96  200k  [0603-RES]  115.39,38.25 270 top
R97  10k  [0603-RES]  15.49,55.24 270 top
R98  1k  [0603-RES]  10.92,59.34 0 top
R99  1k  [0603-RES]  14.35,59.34 180 top
R100  1k  [0603-RES]  9.4,52.84 0 top
R101  1k  [0603-RES]  13.21,52.84 180 top
R102  200k  [0603-RES]  14.04,56.53 270 top
R103  10k  [0603-RES]  29.97,55.24 270 top
R104  1k  [0603-RES]  25.4,59.34 0 top
R105  1k  [0603-RES]  28.83,59.34 180 top
R106  1k  [0603-RES]  23.88,52.84 0 top
R107  1k  [0603-RES]  27.69,52.84 180 top
R108  200k  [0603-RES]  28.52,56.53 270 top
R109  10k  [0603-RES]  44.45,55.24 270 top
R110  1k  [0603-RES]  39.88,59.34 0 top
R111  1k  [0603-RES]  43.31,59.34 180 top
R112  1k  [0603-RES]  38.35,52.84 0 top
R113  1k  [0603-RES]  42.16,52.84 180 top
R114  200k  [0603-RES]  43,56.53 270 top
R115  10k  [0603-RES]  58.93,55.24 270 top
R116  1k  [0603-RES]  54.36,59.34 0 top
R117  1k  [0603-RES]  57.78,59.34 180 top
R118  1k  [0603-RES]  52.83,52.84 0 top
R119  1k  [0603-RES]  56.64,52.84 180 top
R120  200k  [0603-RES]  57.48,56.53 270 top
R121  10k  [0603-RES]  73.41,55.24 270 top
R122  1k  [0603-RES]  68.83,59.34 0 top
R123  1k  [0603-RES]  72.26,59.34 180 top
R124  1k  [0603-RES]  67.31,52.84 0 top
R125  1k  [0603-RES]  71.12,52.84 180 top
R126  200k  [0603-RES]  71.95,56.53 270 top
R127  10k  [0603-RES]  87.88,55.24 270 top
R128  1k  [0603-RES]  83.31,59.34 0 top
R129  1k  [0603-RES]  86.74,59.34 180 top
R130  1k  [0603-RES]  81.79,52.84 0 top
R131  1k  [0603-RES]  85.6,52.84 180 top
R132  200k  [0603-RES]  86.43,56.53 270 top
R133  10k  [0603-RES]  102.36,55.24 270 top
R134  1k  [0603-RES]  97.79,59.34 0 top
R135  1k  [0603-RES]  101.22,59.34 180 top
R136  1k  [0603-RES]  96.27,52.84 0 top
R137  1k  [0603-RES]  100.08,52.84 180 top
R138  200k  [0603-RES]  100.91,56.53 270 top
R139  10k  [0603-RES]  116.84,55.24 270 top
R140  1k  [0603-RES]  112.27,59.34 0 top
R141  1k  [0603-RES]  115.7,59.34 180 top
R142  1k  [0603-RES]  110.74,52.84 0 top
R143  1k  [0603-RES]  114.55,52.84 180 top
R144  200k  [0603-RES]  115.39,56.53 270 top
R145  10k  [0603-RES]  15.49,73.53 270 top
R146  1k  [0603-RES]  10.92,77.62 0 top
R147  1k  [0603-RES]  14.35,77.62 180 top
R148  1k  [0603-RES]  9.4,71.12 0 top
R149  1k  [0603-RES]  13.21,71.12 180 top
R150  200k  [0603-RES]  14.04,74.82 270 top
R151  10k  [0603-RES]  29.97,73.53 270 top
R152  1k  [0603-RES]  25.4,77.62 0 top
R153  1k  [0603-RES]  28.83,77.62 180 top
R154  1k  [0603-RES]  23.88,71.12 0 top
R155  1k  [0603-RES]  27.69,71.12 180 top
R156  200k  [0603-RES]  28.52,74.82 270 top
R157  10k  [0603-RES]  44.45,73.53 270 top
R158  1k  [0603-RES]  39.88,77.62 0 top
R159  1k  [0603-RES]  43.31,77.62 180 top
R160  1k  [0603-RES]  38.35,71.12 0 top
R161  1k  [0603-RES]  42.16,71.12 180 top
R162  200k  [0603-RES]  43,74.82 270 top
R163  10k  [0603-RES]  58.93,73.53 270 top
R164  1k  [0603-RES]  54.36,77.62 0 top
R165  1k  [0603-RES]  57.78,77.62 180 top
R166  1k  [0603-RES]  52.83,71.12 0 top
R167  1k  [0603-RES]  56.64,71.12 180 top
R168  200k  [0603-RES]  57.48,74.82 270 top
R169  10k  [0603-RES]  73.41,73.53 270 top
R170  1k  [0603-RES]  68.83,77.62 0 top
R171  1k  [0603-RES]  72.26,77.62 180 top
R172  1k  [0603-RES]  67.31,71.12 0 top
R173  1k  [0603-RES]  71.12,71.12 180 top
R174  200k  [0603-RES]  71.95,74.82 270 top
R175  10k  [0603-RES]  87.88,73.53 270 top
R176  1k  [0603-RES]  83.31,77.62 0 top
R177  1k  [0603-RES]  86.74,77.62 180 top
R178  1k  [0603-RES]  81.79,71.12 0 top
R179  1k  [0603-RES]  85.6,71.12 180 top
R180  200k  [0603-RES]  86.43,74.82 270 top
R181  10k  [0603-RES]  102.36,73.53 270 top
R182  1k  [0603-RES]  97.79,77.62 0 top
R183  1k  [0603-RES]  101.22,77.62 180 top
R184  1k  [0603-RES]  96.27,71.12 0 top
R185  1k  [0603-RES]  100.08,71.12 180 top
R186  200k  [0603-RES]  100.91,74.82 270 top
R187  10k  [0603-RES]  116.84,73.53 270 top
R188  1k  [0603-RES]  112.27,77.62 0 top
R189  1k  [0603-RES]  115.7,77.62 180 top
R190  1k  [0603-RES]  110.74,71.12 0 top
R191  1k  [0603-RES]  114.55,71.12 180 top
R192  200k  [0603-RES]  115.39,74.82 270 top
R193  10k  [0603-RES]  15.49,91.82 270 top
R194  1k  [0603-RES]  10.92,95.91 0 top
R195  1k  [0603-RES]  14.35,95.91 180 top
R196  1k  [0603-RES]  9.4,89.41 0 top
R197  1k  [0603-RES]  13.21,89.41 180 top
R198  200k  [0603-RES]  14.04,93.11 270 top
R199  10k  [0603-RES]  29.97,91.82 270 top
R200  1k  [0603-RES]  25.4,95.91 0 top
R201  1k  [0603-RES]  28.83,95.91 180 top
R202  1k  [0603-RES]  23.88,89.41 0 top
R203  1k  [0603-RES]  27.69,89.41 180 top
R204  200k  [0603-RES]  28.52,93.11 270 top
R205  10k  [0603-RES]  44.45,91.82 270 top
R206  1k  [0603-RES]  39.88,95.91 0 top
R207  1k  [0603-RES]  43.31,95.91 180 top
R208  1k  [0603-RES]  38.35,89.41 0 top
R209  1k  [0603-RES]  42.16,89.41 180 top
R210  200k  [0603-RES]  43,93.11 270 top
R211  10k  [0603-RES]  58.93,91.82 270 top
R212  1k  [0603-RES]  54.36,95.91 0 top
R213  1k  [0603-RES]  57.78,95.91 180 top
R214  1k  [0603-RES]  52.83,89.41 0 top
R215  1k  [0603-RES]  56.64,89.41 180 top
R216  200k  [0603-RES]  57.48,93.11 270 top
R217  10k  [0603-RES]  73.41,91.82 270 top
R218  1k  [0603-RES]  68.83,95.91 0 top
R219  1k  [0603-RES]  72.26,95.91 180 top
R220  1k  [0603-RES]  67.31,89.41 0 top
R221  1k  [0603-RES]  71.12,89.41 180 top
R222  200k  [0603-RES]  71.95,93.11 270 top
R223  10k  [0603-RES]  87.88,91.82 270 top
R224  1k  [0603-RES]  83.31,95.91 0 top
R225  1k  [0603-RES]  86.74,95.91 180 top
R226  1k  [0603-RES]  81.79,89.41 0 top
R227  1k  [0603-RES]  85.6,89.41 180 top
R228  200k  [0603-RES]  86.43,93.11 270 top
R229  10k  [0603-RES]  102.36,91.82 270 top
R230  1k  [0603-RES]  97.79,95.91 0 top
R231  1k  [0603-RES]  101.22,95.91 180 top
R232  1k  [0603-RES]  96.27,89.41 0 top
R233  1k  [0603-RES]  100.08,89.41 180 top
R234  200k  [0603-RES]  100.91,93.11 270 top
R235  10k  [0603-RES]  116.84,91.82 270 top
R236  1k  [0603-RES]  112.27,95.91 0 top
R237  1k  [0603-RES]  115.7,95.91 180 top
R238  1k  [0603-RES]  110.74,89.41 0 top
R239  1k  [0603-RES]  114.55,89.41 180 top
R240  200k  [0603-RES]  115.39,93.11 270 top
R241  10k  [0603-RES]  15.49,110.11 270 top
R242  1k  [0603-RES]  10.92,114.2 0 top
R243  1k  [0603-RES]  14.35,114.2 180 top
R244  1k  [0603-RES]  9.4,107.7 0 top
R245  1k  [0603-RES]  13.21,107.7 180 top
R246  200k  [0603-RES]  14.04,111.4 270 top
R247  10k  [0603-RES]  29.97,110.11 270 top
R248  1k  [0603-RES]  25.4,114.2 0 top
R249  1k  [0603-RES]  28.83,114.2 180 top
R250  1k  [0603-RES]  23.88,107.7 0 top
R251  1k  [0603-RES]  27.69,107.7 180 top
R252  200k  [0603-RES]  28.52,111.4 270 top
R253  10k  [0603-RES]  44.45,110.11 270 top
R254  1k  [0603-RES]  39.88,114.2 0 top
R255  1k  [0603-RES]  43.31,114.2 180 top
R256  1k  [0603-RES]  38.35,107.7 0 top
R257  1k  [0603-RES]  42.16,107.7 180 top
R258  200k  [0603-RES]  43,111.4 270 top
R259  10k  [0603-RES]  58.93,110.11 270 top
R260  1k  [0603-RES]  54.36,114.2 0 top
R261  1k  [0603-RES]  57.78,114.2 180 top
R262  1k  [0603-RES]  52.83,107.7 0 top
R263  1k  [0603-RES]  56.64,107.7 180 top
R264  200k  [0603-RES]  57.48,111.4 270 top
R265  10k  [0603-RES]  73.41,110.11 270 top
R266  1k  [0603-RES]  68.83,114.2 0 top
R267  1k  [0603-RES]  72.26,114.2 180 top
R268  1k  [0603-RES]  67.31,107.7 0 top
R269  1k  [0603-RES]  71.12,107.7 180 top
R270  200k  [0603-RES]  71.95,111.4 270 top
R271  10k  [0603-RES]  87.88,110.11 270 top
R272  1k  [0603-RES]  83.31,114.2 0 top
R273  1k  [0603-RES]  86.74,114.2 180 top
R274  1k  [0603-RES]  81.79,107.7 0 top
R275  1k  [0603-RES]  85.6,107.7 180 top
R276  200k  [0603-RES]  86.43,111.4 270 top
R277  10k  [0603-RES]  102.36,110.11 270 top
R278  1k  [0603-RES]  97.79,114.2 0 top
R279  1k  [0603-RES]  101.22,114.2 180 top
R280  1k  [0603-RES]  96.27,107.7 0 top
R281  1k  [0603-RES]  100.08,107.7 180 top
R282  200k  [0603-RES]  100.91,111.4 270 top
R283  10k  [0603-RES]  116.84,110.11 270 top
R284  1k  [0603-RES]  112.27,114.2 0 top
R285  1k  [0603-RES]  115.7,114.2 180 top
R286  1k  [0603-RES]  110.74,107.7 0 top
R287  1k  [0603-RES]  114.55,107.7 180 top
R288  200k  [0603-RES]  115.39,111.4 270 top
U1  MMA8452QMMA8452Q-1:1  [MMA8452Q-1:1]  18.29,19.56 270 top
U2  MIC5205-3.3V  [SOT23-5]  18.92,11.94 0 top
U3  PCA9306  [PCA9306DC-1:1]  11.94,19.56 180 top
U4  PCA9306  [PCA9306DC-1:1]  26.42,19.56 180 top
U5  MMA8452QMMA8452Q-1:1  [MMA8452Q-1:1]  32.77,19.56 270 top
U6  MIC5205-3.3V  [SOT23-5]  33.4,11.94 0 top
U7  PCA9306  [PCA9306DC-1:1]  40.89,19.56 180 top
U8  MMA8452QMMA8452Q-1:1  [MMA8452Q-1:1]  47.24,19.56 270 top
U9  MIC5205-3.3V  [SOT23-5]  47.88,11.94 0 top
U10  PCA9306  [PCA9306DC-1:1]  55.37,19.56 180 top
U11  MMA8452QMMA8452Q-1:1  [MMA8452Q-1:1]  61.72,19.56 270 top
U12  MIC5205-3.3V  [SOT23-5]  62.36,11.94 0 top
U13  PCA9306  [PCA9306DC-1:1]  69.85,19.56 180 top
U14  MMA8452QMMA8452Q-1:1  [MMA8452Q-1:1]  76.2,19.56 270 top
U15  MIC5205-3.3V  [SOT23-5]  76.83,11.94 0 top
U16  PCA9306  [PCA9306DC-1:1]  84.33,19.56 180 top
U17  MMA8452QMMA8452Q-1:1  [MMA8452Q-1:1]  90.68,19.56 270 top
U18  MIC5205-3.3V  [SOT23-5]  91.31,11.94 0 top
U19  PCA9306  [PCA9306DC-1:1]  98.81,19.56 180 top
U20  MMA8452QMMA8452Q-1:1  [MMA8452Q-1:1]  105.16,19.56 270 top
U21  MIC5205-3.3V  [SOT23-5]  105.79,11.94 0 top
U22  PCA9306  [PCA9306DC-1:1]  113.28,19.56 180 top
U23  MMA8452QMMA8452Q-1:1  [MMA8452Q-1:1]  119.63,19.56 270 top
U24  MIC5205-3.3V  [SOT23-5]  120.27,11.94 0 top
U25  PCA9306  [PCA9306DC-1:1]  11.94,37.85 180 top
U26  MMA8452QMMA8452Q-1:1  [MMA8452Q-1:1]  18.29,37.85 270 top
U27  MIC5205-3.3V  [SOT23-5]  18.92,30.23 0 top
U28  PCA9306  [PCA9306DC-1:1]  26.42,37.85 180 top
U29  MMA8452QMMA8452Q-1:1  [MMA8452Q-1:1]  32.77,37.85 270 top
U30  MIC5205-3.3V  [SOT23-5]  33.4,30.23 0 top
U31  PCA9306  [PCA9306DC-1:1]  40.89,37.85 180 top
U32  MMA8452QMMA8452Q-1:1  [MMA8452Q-1:1]  47.24,37.85 270 top
U33  MIC5205-3.3V  [SOT23-5]  47.88,30.23 0 top
U34  PCA9306  [PCA9306DC-1:1]  55.37,37.85 180 top
U35  MMA8452QMMA8452Q-1:1  [MMA8452Q-1:1]  61.72,37.85 270 top
U36  MIC5205-3.3V  [SOT23-5]  62.36,30.23 0 top
U37  PCA9306  [PCA9306DC-1:1]  69.85,37.85 180 top
U38  MMA8452QMMA8452Q-1:1  [MMA8452Q-1:1]  76.2,37.85 270 top
U39  MIC5205-3.3V  [SOT23-5]  76.83,30.23 0 top
U40  PCA9306  [PCA9306DC-1:1]  84.33,37.85 180 top
U41  MMA8452QMMA8452Q-1:1  [MMA8452Q-1:1]  90.68,37.85 270 top
U42  MIC5205-3.3V  [SOT23-5]  91.31,30.23 0 top
U43  PCA9306  [PCA9306DC-1:1]  98.81,37.85 180 top
U44  MMA8452QMMA8452Q-1:1  [MMA8452Q-1:1]  105.16,37.85 270 top
U45  MIC5205-3.3V  [SOT23-5]  105.79,30.23 0 top
U46  PCA9306  [PCA9306DC-1:1]  113.28,37.85 180 top
U47  MMA8452QMMA8452Q-1:1  [MMA8452Q-1:1]  119.63,37.85 270 top
U48  MIC5205-3.3V  [SOT23-5]  120.27,30.23 0 top
U49  PCA9306  [PCA9306DC-1:1]  11.94,56.13 180 top
U50  MMA8452QMMA8452Q-1:1  [MMA8452Q-1:1]  18.29,56.13 270 top
U51  MIC5205-3.3V  [SOT23-5]  18.92,48.51 0 top
U52  PCA9306  [PCA9306DC-1:1]  26.42,56.13 180 top
U53  MMA8452QMMA8452Q-1:1  [MMA8452Q-1:1]  32.77,56.13 270 top
U54  MIC5205-3.3V  [SOT23-5]  33.4,48.51 0 top
U55  PCA9306  [PCA9306DC-1:1]  40.89,56.13 180 top
U56  MMA8452QMMA8452Q-1:1  [MMA8452Q-1:1]  47.24,56.13 270 top
U57  MIC5205-3.3V  [SOT23-5]  47.88,48.51 0 top
U58  PCA9306  [PCA9306DC-1:1]  55.37,56.13 180 top
U59  MMA8452QMMA8452Q-1:1  [MMA8452Q-1:1]  61.72,56.13 270 top
U60  MIC5205-3.3V  [SOT23-5]  62.36,48.51 0 top
U61  PCA9306  [PCA9306DC-1:1]  69.85,56.13 180 top
U62  MMA8452QMMA8452Q-1:1  [MMA8452Q-1:1]  76.2,56.13 270 top
U63  MIC5205-3.3V  [SOT23-5]  76.83,48.51 0 top
U64  PCA9306  [PCA9306DC-1:1]  84.33,56.13 180 top
U65  MMA8452QMMA8452Q-1:1  [MMA8452Q-1:1]  90.68,56.13 270 top
U66  MIC5205-3.3V  [SOT23-5]  91.31,48.51 0 top
U67  PCA9306  [PCA9306DC-1:1]  98.81,56.13 180 top
U68  MMA8452QMMA8452Q-1:1  [MMA8452Q-1:1]  105.16,56.13 270 top
U69  MIC5205-3.3V  [SOT23-5]  105.79,48.51 0 top
U70  PCA9306  [PCA9306DC-1:1]  113.28,56.13 180 top
U71  MMA8452QMMA8452Q-1:1  [MMA8452Q-1:1]  119.63,56.13 270 top
U72  MIC5205-3.3V  [SOT23-5]  120.27,48.51 0 top
U73  PCA9306  [PCA9306DC-1:1]  11.94,74.42 180 top
U74  MMA8452QMMA8452Q-1:1  [MMA8452Q-1:1]  18.29,74.42 270 top
U75  MIC5205-3.3V  [SOT23-5]  18.92,66.8 0 top
U76  PCA9306  [PCA9306DC-1:1]  26.42,74.42 180 top
U77  MMA8452QMMA8452Q-1:1  [MMA8452Q-1:1]  32.77,74.42 270 top
U78  MIC5205-3.3V  [SOT23-5]  33.4,66.8 0 top
U79  PCA9306  [PCA9306DC-1:1]  40.89,74.42 180 top
U80  MMA8452QMMA8452Q-1:1  [MMA8452Q-1:1]  47.24,74.42 270 top
U81  MIC5205-3.3V  [SOT23-5]  47.88,66.8 0 top
U82  PCA9306  [PCA9306DC-1:1]  55.37,74.42 180 top
U83  MMA8452QMMA8452Q-1:1  [MMA8452Q-1:1]  61.72,74.42 270 top
U84  MIC5205-3.3V  [SOT23-5]  62.36,66.8 0 top
U85  PCA9306  [PCA9306DC-1:1]  69.85,74.42 180 top
U86  MMA8452QMMA8452Q-1:1  [MMA8452Q-1:1]  76.2,74.42 270 top
U87  MIC5205-3.3V  [SOT23-5]  76.83,66.8 0 top
U88  PCA9306  [PCA9306DC-1:1]  84.33,74.42 180 top
U89  MMA8452QMMA8452Q-1:1  [MMA8452Q-1:1]  90.68,74.42 270 top
U90  MIC5205-3.3V  [SOT23-5]  91.31,66.8 0 top
U91  PCA9306  [PCA9306DC-1:1]  98.81,74.42 180 top
U92  MMA8452QMMA8452Q-1:1  [MMA8452Q-1:1]  105.16,74.42 270 top
U93  MIC5205-3.3V  [SOT23-5]  105.79,66.8 0 top
U94  PCA9306  [PCA9306DC-1:1]  113.28,74.42 180 top
U95  MMA8452QMMA8452Q-1:1  [MMA8452Q-1:1]  119.63,74.42 270 top
U96  MIC5205-3.3V  [SOT23-5]  120.27,66.8 0 top
U97  PCA9306  [PCA9306DC-1:1]  11.94,92.71 180 top
U98  MMA8452QMMA8452Q-1:1  [MMA8452Q-1:1]  18.29,92.71 270 top
U99  MIC5205-3.3V  [SOT23-5]  18.92,85.09 0 top
U100  PCA9306  [PCA9306DC-1:1]  26.42,92.71 180 top
U101  MMA8452QMMA8452Q-1:1  [MMA8452Q-1:1]  32.77,92.71 270 top
U102  MIC5205-3.3V  [SOT23-5]  33.4,85.09 0 top
U103  PCA9306  [PCA9306DC-1:1]  40.89,92.71 180 top
U104  MMA8452QMMA8452Q-1:1  [MMA8452Q-1:1]  47.24,92.71 270 top
U105  MIC5205-3.3V  [SOT23-5]  47.88,85.09 0 top
U106  PCA9306  [PCA9306DC-1:1]  55.37,92.71 180 top
U107  MMA8452QMMA8452Q-1:1  [MMA8452Q-1:1]  61.72,92.71 270 top
U108  MIC5205-3.3V  [SOT23-5]  62.36,85.09 0 top
U109  PCA9306  [PCA9306DC-1:1]  69.85,92.71 180 top
U110  MMA8452QMMA8452Q-1:1  [MMA8452Q-1:1]  76.2,92.71 270 top
U111  MIC5205-3.3V  [SOT23-5]  76.83,85.09 0 top
U112  PCA9306  [PCA9306DC-1:1]  84.33,92.71 180 top
U113  MMA8452QMMA8452Q-1:1  [MMA8452Q-1:1]  90.68,92.71 270 top
U114  MIC5205-3.3V  [SOT23-5]  91.31,85.09 0 top
U115  PCA9306  [PCA9306DC-1:1]  98.81,92.71 180 top
U116  MMA8452QMMA8452Q-1:1  [MMA8452Q-1:1]  105.16,92.71 270 top
U117  MIC5205-3.3V  [SOT23-5]  105.79,85.09 0 top
U118  PCA9306  [PCA9306DC-1:1]  113.28,92.71 180 top
U119  MMA8452QMMA8452Q-1:1  [MMA8452Q-1:1]  119.63,92.71 270 top
U120  MIC5205-3.3V  [SOT23-5]  120.27,85.09 0 top
U121  PCA9306  [PCA9306DC-1:1]  11.94,111 180 top
U122  MMA8452QMMA8452Q-1:1  [MMA8452Q-1:1]  18.29,111 270 top
U123  MIC5205-3.3V  [SOT23-5]  18.92,103.38 0 top
U124  PCA9306  [PCA9306DC-1:1]  26.42,111 180 top
U125  MMA8452QMMA8452Q-1:1  [MMA8452Q-1:1]  32.77,111 270 top
U126  MIC5205-3.3V  [SOT23-5]  33.4,103.38 0 top
U127  PCA9306  [PCA9306DC-1:1]  40.89,111 180 top
U128  MMA8452QMMA8452Q-1:1  [MMA8452Q-1:1]  47.24,111 270 top
U129  MIC5205-3.3V  [SOT23-5]  47.88,103.38 0 top
U130  PCA9306  [PCA9306DC-1:1]  55.37,111 180 top
U131  MMA8452QMMA8452Q-1:1  [MMA8452Q-1:1]  61.72,111 270 top
U132  MIC5205-3.3V  [SOT23-5]  62.36,103.38 0 top
U133  PCA9306  [PCA9306DC-1:1]  69.85,111 180 top
U134  MMA8452QMMA8452Q-1:1  [MMA8452Q-1:1]  76.2,111 270 top
U135  MIC5205-3.3V  [SOT23-5]  76.83,103.38 0 top
U136  PCA9306  [PCA9306DC-1:1]  84.33,111 180 top
U137  MMA8452QMMA8452Q-1:1  [MMA8452Q-1:1]  90.68,111 270 top
U138  MIC5205-3.3V  [SOT23-5]  91.31,103.38 0 top
U139  PCA9306  [PCA9306DC-1:1]  98.81,111 180 top
U140  MMA8452QMMA8452Q-1:1  [MMA8452Q-1:1]  105.16,111 270 top
U141  MIC5205-3.3V  [SOT23-5]  105.79,103.38 0 top
U142  PCA9306  [PCA9306DC-1:1]  113.28,111 180 top
U143  MMA8452QMMA8452Q-1:1  [MMA8452Q-1:1]  119.63,111 270 top
U144  MIC5205-3.3V  [SOT23-5]  120.27,103.38 0 top

## Library data of the parts
C1 C3-C5 C7-C9 C11-C13 C15-C17 C19-C21 C23-C25 C27-C29 C31-C33 C35-C37 C39-C41 C43-C45 C47-C49 C51-C53 C55-C57 C59-C61 C63-C65 C67-C69 C71-C73 C75-C77 C79-C81 C83-C85 C87-C89 C91-C93 C95-C97 C99-C101 C103-C105 C107-C109 C111-C113 C115-C117 C119-C121 C123-C125 C127-C129 C131-C133 C135-C137 C139-C141 C143-C145 C147-C149 C151-C153 C155-C157 C159-C161 C163-C165 C167-C169 C171-C173 C175-C177 C179-C181 C183-C185 C187-C189 C191 C192 = SparkFun-Capacitors; PROD_ID: CAP-00810
C2 C6 C10 C14 C18 C22 C26 C30 C34 C38 C42 C46 C50 C54 C58 C62 C66 C70 C74 C78 C82 C86 C90 C94 C98 C102 C106 C110 C114 C118 C122 C126 C130 C134 C138 C142 C146 C150 C154 C158 C162 C166 C170 C174 C178 C182 C186 C190 = SparkFun-Capacitors; PROD_ID: CAP-08280
E$1 = SparkFun-Retired
E$4 E$6 FID1-FID96 LOGO1-LOGO96 = SparkFun-Aesthetics
JP1 JP3 JP5 JP7 JP9 JP11 JP13 JP15 JP17 JP19 JP21 JP23 JP25 JP27 JP29 JP31 JP33 JP35 JP37 JP39 JP41 JP43 JP45 JP47 JP49 JP51 JP53 JP55 JP57 JP59 JP61 JP63 JP65 JP67 JP69 JP71 JP73 JP75 JP77 JP79 JP81 JP83 JP85 JP87 JP89 JP91 JP93 JP95 = SparkFun-Connectors; PROD_ID: CONN-11415
JP2 JP4 JP6 JP8 JP10 JP12 JP14 JP16 JP18 JP20 JP22 JP24 JP26 JP28 JP30 JP32 JP34 JP36 JP38 JP40 JP42 JP44 JP46 JP48 JP50 JP52 JP54 JP56 JP58 JP60 JP62 JP64 JP66 JP68 JP70 JP72 JP74 JP76 JP78 JP80 JP82 JP84 JP86 JP88 JP90 JP92 JP94 JP96 = SparkFun-Connectors; PROD_ID: CONN-11290
R1 R7 R13 R19 R25 R31 R37 R43 R49 R55 R61 R67 R73 R79 R85 R91 R97 R103 R109 R115 R121 R127 R133 R139 R145 R151 R157 R163 R169 R175 R181 R187 R193 R199 R205 R211 R217 R223 R229 R235 R241 R247 R253 R259 R265 R271 R277 R283 = SparkFun-Resistors; PROD_ID: RES-00824
R2-R5 R8-R11 R14-R17 R20-R23 R26-R29 R32-R35 R38-R41 R44-R47 R50-R53 R56-R59 R62-R65 R68-R71 R74-R77 R80-R83 R86-R89 R92-R95 R98-R101 R104-R107 R110-R113 R116-R119 R122-R125 R128-R131 R134-R137 R140-R143 R146-R149 R152-R155 R158-R161 R164-R167 R170-R173 R176-R179 R182-R185 R188-R191 R194-R197 R200-R203 R206-R209 R212-R215 R218-R221 R224-R227 R230-R233 R236-R239 R242-R245 R248-R251 R254-R257 R260-R263 R266-R269 R272-R275 R278-R281 R284-R287 = SparkFun-Resistors; PROD_ID: RES-07856
R6 R12 R18 R24 R30 R36 R42 R48 R54 R60 R66 R72 R78 R84 R90 R96 R102 R108 R114 R120 R126 R132 R138 R144 R150 R156 R162 R168 R174 R180 R186 R192 R198 R204 R210 R216 R222 R228 R234 R240 R246 R252 R258 R264 R270 R276 R282 R288 = SparkFun-Resistors; PROD_ID: RES-09385
U1 U5 U8 U11 U14 U17 U20 U23 U26 U29 U32 U35 U38 U41 U44 U47 U50 U53 U56 U59 U62 U65 U68 U71 U74 U77 U80 U83 U86 U89 U92 U95 U98 U101 U104 U107 U110 U113 U116 U119 U122 U125 U128 U131 U134 U137 U140 U143 = SparkFun-Sensors
U2 U6 U9 U12 U15 U18 U21 U24 U27 U30 U33 U36 U39 U42 U45 U48 U51 U54 U57 U60 U63 U66 U69 U72 U75 U78 U81 U84 U87 U90 U93 U96 U99 U102 U105 U108 U111 U114 U117 U120 U123 U126 U129 U132 U135 U138 U141 U144 = SparkFun-PowerIC; PROD_ID: VREG-00822
U3 U4 U7 U10 U13 U16 U19 U22 U25 U28 U31 U34 U37 U40 U43 U46 U49 U52 U55 U58 U61 U64 U67 U70 U73 U76 U79 U82 U85 U88 U91 U94 U97 U100 U103 U106 U109 U112 U115 U118 U121 U124 U127 U130 U133 U136 U139 U142 = SparkFun-DigitalIC